# EAGLE board motor-control (EAGLE 7.2.0)
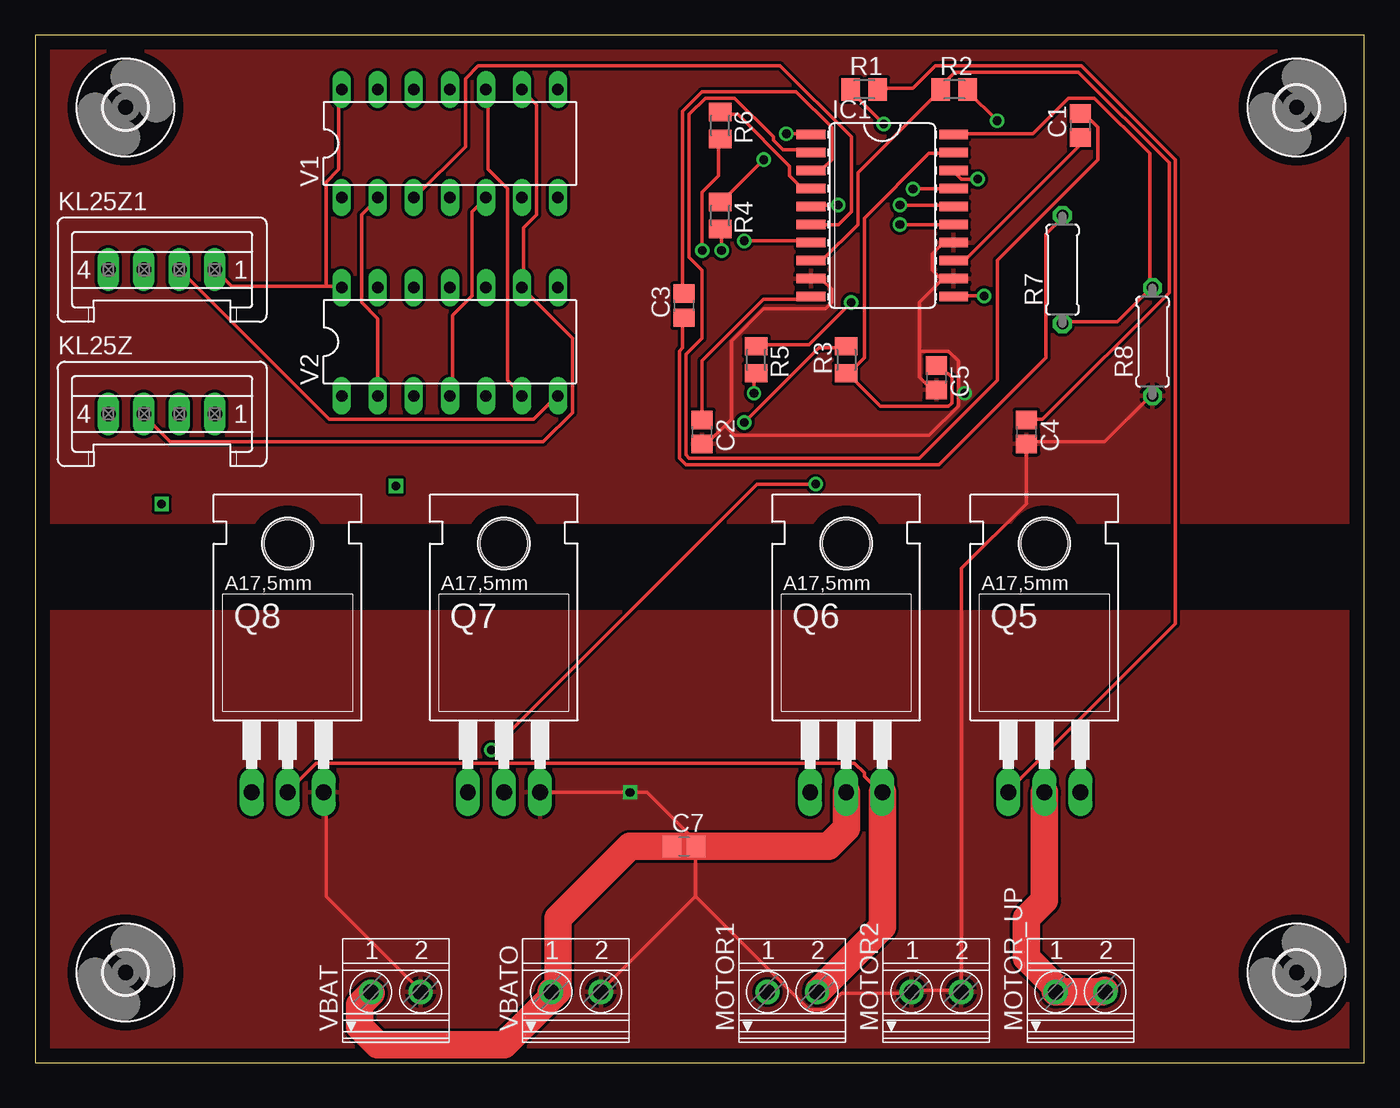
[diagram p0: board, top side]
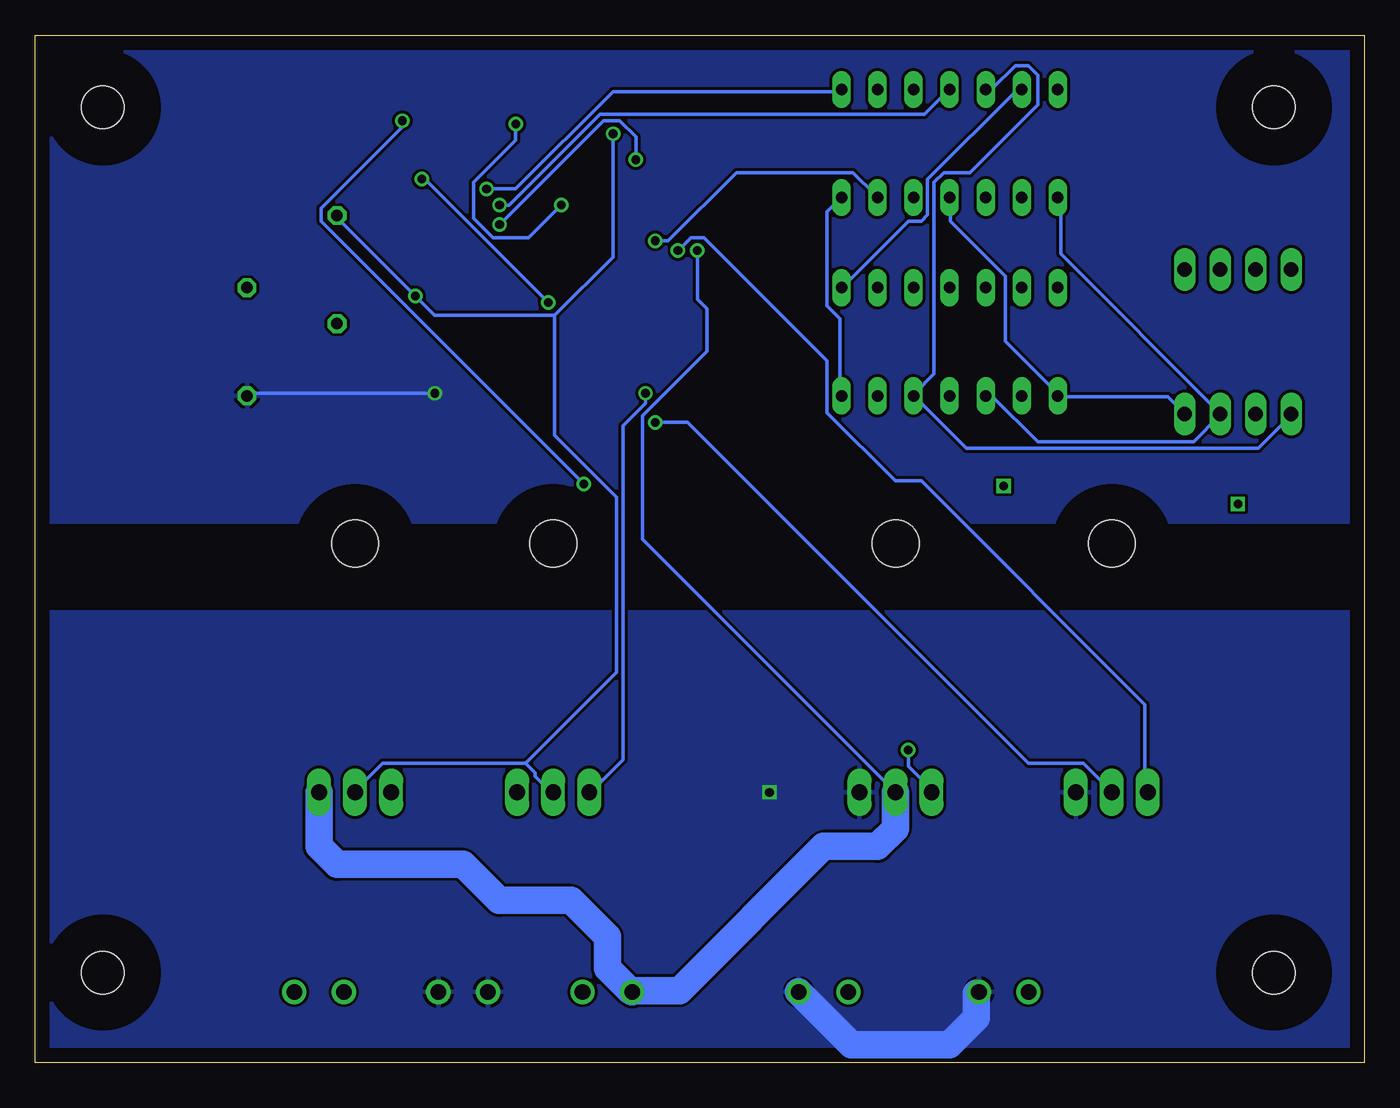
[diagram p1: board, bottom side, seen from below]

Size 93.65 x 72.38 mm. Coordinates in mm from the lower left corner, seen from the top.
Outline: 0,0 93.65,0 93.65,72.38 0,72.38 0,0
Copper layers (1*16): Top 0.035mm / dielectric 1.5mm / Bottom 0.035mm
Design rules "default": minimum track width 10mil, minimum drill 24mil, track to track 8mil, track to pad 8mil, pad to pad 8mil, via to via 8mil, smd to smd 8mil, copper to edge 40mil, drill to drill 8mil, minimum pad ring 10mil, minimum via ring 8mil, stop-mask expansion 4mil, vias tented up to drill 0mil, thermal gap 10mil

## Footprints (pad centres in the part's own frame; a part is rotated, then mirrored left to right if it is on the bottom)
C0805 = smd 1.3 x 1.5: 1 -0.85,0; 2 0.85,0
3,0 = hole 3: 0,0
SO20L = smd 0.66 x 2.032: 1 -5.715,-5.029; 2 -4.445,-5.029; 3 -3.175,-5.029; 4 -1.905,-5.029; 5 -0.635,-5.029; 6 0.635,-5.029; 7 1.905,-5.029; 8 3.175,-5.029; 9 4.445,-5.029; 10 5.715,-5.029; 11 5.715,5.029; 12 4.445,5.029; 13 3.175,5.029; 14 1.905,5.029; 15 0.635,5.029; 16 -0.635,5.029; 17 -1.905,5.029; 18 -3.175,5.029; 19 -4.445,5.029; 20 -5.715,5.029
S04P = drill 1.016 long: 1 3.75,0; 2 1.25,0; 3 -1.25,0; 4 -3.75,0
1751248 = drill 1.1 pad 1.7: 1 -1.75,-0.1; 2 1.75,-0.1
TO220AH = drill 1.118 long: B -2.54,-6.35; C 0,-6.35; E 2.54,-6.35 | hole 3.302: 0,11.176
M0805 = smd 1.3 x 1.6: 1 -0.95,0; 2 0.95,0
0207/7 = drill 0.813 octagon: 1 -3.81,0; 2 3.81,0
DIL14 = drill 0.813 long: 1 -7.62,-3.81; 2 -5.08,-3.81; 3 -2.54,-3.81; 4 0,-3.81; 5 2.54,-3.81; 6 5.08,-3.81; 7 7.62,-3.81; 8 7.62,3.81; 9 5.08,3.81; 10 2.54,3.81; 11 0,3.81; 12 -2.54,3.81; 13 -5.08,3.81; 14 -7.62,3.81

## Placement (x,y rotation side)
C1  33 nF  [C0805]  73.66,66.04 90 top
C2  470 nF  [C0805]  46.99,44.45 270 top
C3  470 nF  [C0805]  45.72,53.34 90 top
C4  10 nF  [C0805]  69.85,44.45 270 top
C5  10 nF  [C0805]  63.5,48.26 270 top
C7  1000 uF  [C0805]  45.72,15.24 0 top
H1  MOUNT-HOLE3.0  [3,0]  6.35,6.35 0 top
H2  MOUNT-HOLE3.0  [3,0]  88.9,6.35 0 top
H3  MOUNT-HOLE3.0  [3,0]  88.9,67.31 0 top
H4  MOUNT-HOLE3.0  [3,0]  6.35,67.31 0 top
IC1  MC33883DW  [SO20L]  59.69,59.69 270 top
KL25Z  [S04P]  8.89,45.72 0 top
KL25Z1  [S04P]  8.89,55.88 0 top
MOTOR1  1751248  [1751248]  53.34,5.08 0 top
MOTOR2  1751248  [1751248]  63.5,5.08 0 top
MOTOR_UP  1751248  [1751248]  73.66,5.08 0 top
Q5  IRF3704  [TO220AH]  71.12,25.4 0 top
Q6  IRF3704  [TO220AH]  57.15,25.4 0 top
Q7  IRF3704  [TO220AH]  33.02,25.4 0 top
Q8  IRF3704  [TO220AH]  17.78,25.4 0 top
R1  50  [M0805]  58.42,68.58 0 top
R2  50  [M0805]  64.77,68.58 0 top
R3  10  [M0805]  57.15,49.53 90 top
R4  50  [M0805]  48.26,59.69 270 top
R5  50  [M0805]  50.8,49.53 270 top
R6  10  [M0805]  48.26,66.04 270 top
R7  [0207/7]  72.39,55.88 90 top
R8  [0207/7]  78.74,50.8 90 top
V1  7408N  [DIL14]  29.21,64.77 0 top
V2  7404N  [DIL14]  29.21,50.8 0 top
VBAT  1751248  [1751248]  25.4,5.08 0 top
VBATO  1751248  [1751248]  38.1,5.08 0 top

## Library data of the parts
C1-C5 C7 R1-R8 = adafruit
H1-H4 = holes
IC1 = motorola-sensor-driver; OC_FARNELL: unknown; OC_NEWARK: unknown
KL25Z KL25Z1 = con-amp-mt; OC_FARNELL: unknown; OC_NEWARK: unknown
MOTOR1 MOTOR2 MOTOR_UP VBAT VBATO = con-phoenix-350; OC_FARNELL: unknown; OC_NEWARK: unknown
Q5-Q8 = transistor-power
V1 V2 = 74ttl-din

## Nets
GND: C2.2 C4.2 C5.2 C7.2 IC1.9 IC1.12 IC1.14 MOTOR2.1 MOTOR2.2 Q7.E Q8.E R8.1 VBAT.2 VBATO.2
N$1: IC1.17 V1.8
N$2: V1.2 V2.2
N$3: IC1.6 V1.3
N$4: IC1.7 V1.6
N$5: C1.1 IC1.13
N$6: C1.2 IC1.2
N$7: KL25Z1.1 V1.14 V2.14
N$8: C2.1 IC1.10
N$9: C3.2 IC1.3
N$10: IC1.5 R1.1
N$11: Q5.B R1.2
N$12: MOTOR1.2 Q6.E Q8.C R3.2
N$13: KL25Z1.2 V1.7 V2.7
N$14: C3.1 C7.1 IC1.1 IC1.11 MOTOR_UP.1 MOTOR_UP.2 Q5.C Q6.C R7.2 VBAT.1 VBATO.1
N$16: MOTOR1.1 Q5.E Q7.C R6.2
N$17: Q6.B R5.2
N$18: Q8.B R4.2
N$19: C5.1 IC1.19 R3.1
N$20: IC1.4 R6.1
N$21: C4.1 IC1.8 R2.1
N$22: KL25Z.2 V1.1 V2.3
N$23: IC1.20 R7.1 R8.2
N$24: V1.5 V2.4
N$25: KL25Z.1 V1.4 V2.1
N$26: V1.10 V2.6
N$27: V1.13 V2.8
N$28: KL25Z.4 V1.12 V2.5
N$29: IC1.16 V1.11
N$30: KL25Z.3 V1.9 V2.9
N$31: Q7.B R2.2
N$34: IC1.18 R5.1
N$35: IC1.15 R4.1

## Tracks (layer width: path | path; a pad name or v marks a point on that pad's centre or on a via)
GND  (via drill 0.6, 0.61)
  Top 0.254: R8.1 78.54,46.94 75.34,43.74 69.85,43.74 C4.2 69.85,39.39 65.28,34.82 65.28,5.1 MOTOR2.2 65.05,5.1 61.85,5.1 MOTOR2.1 61.62,4.88 56.82,4.88 55.68,3.73 54.53,3.73 46.53,11.73 | 62.31,50.14 62.31,53.57 63.91,55.17 | 62.31,50.14 62.31,48.31 62.99,47.62 63.45,47.62 C5.2 | 63.91,55.17 64.59,55.17 IC1.12 63.91,55.17 | 63.91,55.17 63.22,55.85 63.22,57 63.91,57.68 64.59,57.68 IC1.14 | 48.59,44.88 49.05,45.34 49.05,50.82 51.33,53.11 55.68,53.11 56.13,53.57 56.13,54.48 55.45,55.17 54.76,55.17 IC1.9 | 48.59,44.88 47.45,43.74 46.99,43.74 C2.2 | 62.31,50.14 64.36,50.14 65.05,49.45 65.05,47.17 | 65.05,47.17 65.05,46.25 62.99,44.2 49.28,44.2 48.59,44.88 | 65.05,47.17 v65.51,47.17 | Q8.E 20.47,19.05 20.47,11.73 27.1,5.1 VBAT.2 | 46.53,11.73 46.53,15.16 C7.2 46.76,15.39 43.1,19.05 v41.91,19.05 Q7.E | 46.53,11.73 39.9,5.1 VBATO.2
  Bottom 0.254: v65.51,47.17 78.54,47.17 R8.1 | 27.33,4.88 VBAT.2 | 39.67,4.88 VBATO.2
  Bottom 1.93: 27.33,4.88 27.33,3.15 29.21,1.27 36.14,1.27 VBATO.2
  pour Top: -1.27,31.75 93.98,31.75 93.98,-1.27 -1.27,-1.27
  pour Bottom: -1.27,31.75 93.98,31.75 93.98,-1.27 -1.27,-1.27
  pour Top: -1.27,38.1 93.98,38.1 93.98,73.66 -1.27,73.66
  pour Bottom: 0,38.1 93.98,38.1 93.98,73.66 0,73.66
N$1  (via drill 0.61)
  Top 0.254: v61.85,61.57 64.59,61.57 IC1.17
  Bottom 0.254: v61.85,61.57 59.79,61.57 52.93,68.43 36.93,68.43 V1.8
N$2
  Top 0.254: V2.2 24.13,52.43 22.99,53.57 22.99,59.74 24.13,60.88 V1.2
N$3
  Top 0.254: IC1.6 56.59,59.05 57.51,59.97 57.51,65.23 52.48,70.26 31.22,70.26 30.3,69.34 30.3,64.54 26.87,61.11 V1.3
N$4  (via drill 0.61)
  Top 0.254: v49.96,57.91 54.53,57.91 IC1.7
  Bottom 0.254: v49.96,57.91 49.05,57.91 44.25,62.71 36.02,62.71 34.42,61.11 V1.6
N$5
  Top 0.254: C1.1 73.51,65 73.51,64.54 65.51,56.54 64.82,56.54 IC1.13
N$6
  Top 0.254: C1.2 73.74,66.83 74.19,66.37 74.42,66.37 74.88,65.91 74.88,63.63 67.79,56.54 67.79,48.08 62.31,42.6 46.08,42.6 45.85,42.82 45.85,49.91 46.99,51.05 46.99,55.85 46.08,56.77 46.08,66.83 47.22,67.97 49.28,67.97 52.02,65.23 52.02,65 52.7,64.31 54.53,64.31 IC1.2
N$7
  Top 0.254: 20.47,54.71 13.84,54.71 12.7,55.85 KL25Z1.1 | 20.47,54.71 21.39,54.71 V2.14 | 20.47,54.71 20.47,62.03 21.39,62.94 21.39,68.43 V1.14
N$8
  Top 0.254: C2.1 46.99,49.45 51.33,53.8 54.53,53.8 IC1.10
N$9
  Top 0.254: C3.2 45.62,54.25 45.62,67.06 46.99,68.43 53.62,68.43 56.13,65.91 56.13,63.63 55.45,62.94 54.76,62.94 IC1.3
N$10  (via drill 0.61)
  Top 0.254: v59.79,66.14 57.51,68.43 R1.1 | v56.59,60.43 54.76,60.43 IC1.5
  Bottom 0.254: v59.79,66.14 59.79,65 62.76,62.03 62.76,59.51 61.39,58.14 58.88,58.14 v56.59,60.43
N$11
  Top 0.254: R1.2 59.56,68.66 61.85,68.66 63.45,70.26 73.74,70.26 80.37,63.63 80.37,30.94 68.48,19.05 Q5.B
N$12  (via drill 0.61)
  Top 0.254: 55.22,5.1 MOTOR1.2 | v49.96,45.11 55.22,50.37 57.05,50.37 R3.2 | Q6.E 59.56,19.05 58.42,20.19 58.42,20.42 57.73,21.11 19.79,21.11 17.73,19.05 Q8.C
  Top 1.93: 55.22,5.1 59.69,9.58 Q6.E
  Bottom 0.254: v49.96,45.11 47.68,45.11 23.67,21.11 19.79,21.11 17.73,19.05 Q8.C
N$13
  Top 0.254: KL25Z1.2 10.18,55.85 20.7,45.34 35.1,45.34 36.7,46.94 V2.7
  Bottom 0.254: V2.7 36.93,47.17 36.93,52.43 37.85,53.34 37.85,59.97 36.93,60.88 V1.7
N$14  (via drill 0.61)
  Top 0.254: C3.1 45.62,52.43 45.62,50.37 45.39,50.14 45.39,42.6 45.85,42.14 63.68,42.14 71.22,49.68 71.22,58.37 72.37,59.51 R7.2 | v66.88,54.03 64.82,54.03 IC1.11 | v52.93,65.46 54.53,65.46 IC1.1 | 44.7,15.16 C7.1 | 23.67,4.88 VBAT.1 | 72.14,5.1 MOTOR_UP.1 71.91,5.1 | 75.34,5.1 MOTOR_UP.2 | 71.22,19.05 Q5.C
  Top 1.93: 23.67,4.88 22.86,4.06 22.86,2.54 24.13,1.27 33.02,1.27 36.83,5.08 | 36.83,5.08 36.83,10.16 41.91,15.24 C7.1 55.88,15.24 57.15,16.51 Q6.C | 75.34,5.1 75.21,4.98 MOTOR_UP.1 | 72.14,5.1 69.85,7.39 69.85,10.16 71.12,11.43 Q5.C | 36.83,5.08 36.45,5.08 VBATO.1
  Bottom 0.254: R7.2 72.37,59.51 v66.88,54.03 65.51,52.65 57.05,52.65 | v52.93,65.46 52.93,56.77 57.05,52.65 | 59.11,21.11 58.42,20.42 58.42,20.19 57.28,19.05 Q6.C | 59.11,21.11 69.16,21.11 71.22,19.05 Q5.C | 57.05,52.65 57.05,44.2 52.7,39.85 52.7,27.51 59.11,21.11
N$16  (via drill 0.61)
  Top 0.254: v46.99,57.23 46.99,61.34 48.13,62.48 48.13,65 R6.2
  Bottom 0.254: 73.51,19.05 Q5.E | 51.79,5.1 MOTOR1.1 51.56,5.1 | v46.99,57.23 46.99,53.8 46.3,53.11 46.3,50.14 50.88,45.57 50.88,36.88 33.05,19.05 Q7.C
  Bottom 1.93: 51.79,5.1 53.34,6.65 53.34,8.89 55.88,11.43 60.96,11.43 63.5,13.97 72.39,13.97 73.66,15.24 Q5.E | 33.05,19.05 33.05,16.49 34.29,15.24 38.1,15.24 48.26,5.08 51.49,5.08 MOTOR1.1
N$17  (via drill 0.61)
  Top 0.254: v50.65,47.17 50.65,48.54 R5.2
  Bottom 0.254: v50.65,47.17 50.65,46.48 52.25,44.88 52.25,21.34 54.53,19.05 Q6.B
N$18  (via drill 0.61)
  Top 0.254: v48.36,57.23 48.36,58.6 R4.2
  Bottom 0.254: v48.36,57.23 47.45,58.14 46.53,58.14 37.85,49.45 37.85,45.8 33.05,41 31.22,41 15.44,25.22 15.44,19.05 Q8.B
N$19
  Top 0.254: 57.28,48.54 59.56,46.25 64.36,46.25 64.59,46.48 64.59,48.31 64.36,48.54 64.14,48.54 63.68,49 C5.1 | 57.28,48.54 58.42,49.68 58.42,59.51 62.99,64.08 64.59,64.08 IC1.19 | 57.28,48.54 R3.1
N$20
  Top 0.254: R6.1 48.36,66.83 49.5,66.83 53.16,63.17 53.16,62.48 53.85,61.8 54.53,61.8 IC1.4
N$21
  Top 0.254: C4.1 69.85,45.34 70.99,45.34 79.91,54.25 79.91,63.4 73.51,69.8 64.82,69.8 63.68,68.66 R2.1 63.68,68.43 57.96,62.71 57.96,59.05 55.45,56.54 54.76,56.54 IC1.8
N$22
  Bottom 0.254: V2.3 26.64,46.94 26.19,46.94 22.99,43.74 12.01,43.74 10.18,45.57 KL25Z.2 10.18,45.8 21.39,57 21.39,60.88 V1.1
N$23
  Top 0.254: IC1.20 64.82,65.46 70.31,65.46 72.82,67.97 74.65,67.97 78.54,64.08 78.54,54.71 R8.2 78.54,54.48 76.25,52.2 72.59,52.2 R7.1
N$24
  Top 0.254: V1.5 30.76,59.97 30.76,54.03 29.39,52.65 29.39,47.17 V2.4
N$25
  Bottom 0.254: KL25Z.1 12.7,45.8 13.84,46.94 21.39,46.94 V2.1 21.61,47.17 25.27,50.82 25.27,55.4 29.16,59.28 29.16,60.88 V1.4
N$26
  Top 0.254: V1.10 31.9,68.43 31.9,62.94 33.27,61.57 33.27,48.08 34.19,47.17 V2.6
N$27
  Bottom 0.254: V2.8 36.7,54.71 32.13,59.28 31.22,59.28 30.76,59.74 30.76,62.25 24.59,68.43 24.13,68.43 V1.13
N$28
  Bottom 0.254: KL25Z.4 5.16,45.57 7.44,43.28 28.02,43.28 31.67,46.94 V2.5 31.67,47.17 30.3,48.54 30.3,62.03 29.62,62.71 27.79,62.71 22.99,67.51 22.99,69.57 23.67,70.26 24.59,70.26 26.19,68.66 26.64,68.66 V1.12
N$29  (via drill 0.61)
  Top 0.254: v60.94,60.43 64.59,60.43 IC1.16
  Bottom 0.254: v60.94,60.43 60.25,60.43 53.85,66.83 30.99,66.83 29.39,68.43 V1.11
N$30
  Top 0.254: V1.9 34.42,68.43 35.33,67.51 35.33,59.74 34.42,58.83 34.42,54.71 V2.9 37.85,51.05 37.85,45.8 35.79,43.74 9.5,43.74 7.67,45.57 KL25Z.3
N$31  (via drill 0.61)
  Top 0.254: v67.79,66.37 65.73,68.43 R2.2 | v54.99,40.77 50.88,40.77 v32.13,22.02
  Bottom 0.254: v67.79,66.37 67.79,65.91 73.51,60.2 73.51,59.28 v54.99,40.77 | v32.13,22.02 32.13,20.88 30.3,19.05 Q7.B
N$34  (via drill 0.61)
  Top 0.254: v57.51,53.57 54.53,50.6 50.88,50.6 R5.1 | v66.42,62.25 65.28,62.25 64.82,62.71 IC1.18
  Bottom 0.254: v57.51,53.57 66.19,62.25 v66.42,62.25
N$35  (via drill 0.61)
  Top 0.254: v51.33,63.63 48.36,60.66 R4.1 | IC1.15 v60.94,59.05
  Bottom 0.254: v51.33,63.63 51.33,65.23 52.48,66.37 53.62,66.37 v60.94,59.05
N$56  (via drill 0.6)
  other vias: 8.89,39.37
N$57  (via drill 0.6)
  other vias: 25.4,40.64